# EAGLE board CT_schematic (EAGLE 7.6.0)

Size 100 x 80 mm. Coordinates in mm from the lower left corner, seen from the top.
Outline: 0,0 100,0 100,80 0,80 0,0
Copper layers (1*16): Top 0.035mm / dielectric 1.5mm / Bottom 0.035mm
Design rules "default": minimum track width 10mil, minimum drill 24mil, track to track 8mil, track to pad 8mil, pad to pad 8mil, via to via 8mil, smd to smd 8mil, copper to edge 40mil, drill to drill 8mil, minimum pad ring 10mil, minimum via ring 8mil, stop-mask expansion 4mil, vias tented up to drill 0mil, thermal gap 10mil

## Footprints (pad centres in the part's own frame; a part is rotated, then mirrored left to right if it is on the bottom)
C0603 = smd 0.8 x 0.8: 1 -0.762,0; 2 0.762,0
C0402 = smd 0.5 x 0.5: 1 -0.508,0; 2 0.508,0
EXV-9B = smd 2.718 x 1.778: 1 -2.108,0; 2 2.108,0
EXV-9H = smd 3.505 x 1.676: 1 -2.857,0; 2 2.857,0
L0603 = smd 0.8 x 0.8: 1 -0.762,0; 2 0.762,0
PJ-037B_PACKAGE = drill 3.7 square: 1 12,0 | drill 3.2 square: 2 6,0
R0603 = smd 0.8 x 0.8: 1 -0.762,0; 2 0.762,0
UFQFPN32 = smd 0.6 x 0.3: 1 -2.35,1.75; 2 -2.35,1.25; 3 -2.35,0.75; 4 -2.35,0.25; 5 -2.35,-0.25; 6 -2.35,-0.75; 7 -2.35,-1.25; 8 -2.35,-1.75; 17 2.35,-1.75; 18 2.35,-1.25; 19 2.35,-0.75; 20 2.35,-0.25; 21 2.35,0.25; 22 2.35,0.75; 23 2.35,1.25; 24 2.35,1.75 | smd 0.3 x 0.6: 9 -1.75,-2.35; 10 -1.25,-2.35; 11 -0.75,-2.35; 12 -0.25,-2.35; 13 0.25,-2.35; 14 0.75,-2.35; 15 1.25,-2.35; 16 1.75,-2.35; 25 1.75,2.35; 26 1.25,2.35; 27 0.75,2.35; 28 0.25,2.35; 29 -0.25,2.35; 30 -0.75,2.35; 31 -1.25,2.35; 32 -1.75,2.35 | smd 3.45 x 3.45: EPAD 0,0
TSC2014IYZGT = smd 0.3 x 0.3: A1 0,0; A2 0.5,0; A3 1,0; B1 0,-0.5; B2 0.5,-0.5; B3 1,-0.5; C1 0,-1; C2 0.5,-1; C3 1,-1; D1 0,-1.5; D2 0.5,-1.5; D3 1,-1.5
HTSS-105-01-G-D = drill 1 pad 1.8 square: 1 0,0 | drill 1 pad 1.8: 2 0,2.54; 3 2.54,0; 4 2.54,2.54; 5 5.08,0; 6 5.08,2.54; 7 7.62,0; 8 7.62,2.54; 9 10.16,0; 10 10.16,2.54
ASEK = smd 1.4 x 1: 1 -1.1,-0.8; 2 1.1,-0.8; 3 1.1,0.8; 4 -1.1,0.8
ASFL1 = smd 1.7 x 1.5: 1 -1.27,-1.1; 2 1.27,-1.1; 3 1.27,1.1; 4 -1.27,1.1
LP2954 = smd 1.6 x 0.6: 1 -2.475,1.905 | smd 1.55 x 0.6: 2 -2.475,0.635; 3 -2.475,-0.635; 4 -2.475,-1.905; 5 2.475,-1.905; 6 2.475,-0.635; 7 2.475,0.635; 8 2.475,1.905
SON-6 = smd 0.55 x 0.3: 1 -0.355,0.5 | smd 0.52 x 0.3: 2 -0.37,0; 3 -0.37,-0.5; 4 0.37,-0.5; 5 0.37,0; 6 0.37,0.5
SW_4-1437565-2 = smd 1.4 x 2.1: 1 -2.23,4.55; 2 -2.23,-4.55; 3 2.23,4.55; 4 2.23,-4.55
LGM67K-G1J2-24-Z = smd 0.8 x 1.4: A -2,0; C 0,0
NC7SZ125M5X = smd 1.3 x 0.7: 1 -1.3,0.95; 2 -1.3,0; 3 -1.3,-0.95; 4 1.3,-0.95; 5 1.3,0.95

## Placement (x,y rotation side)
C1  1e-07  [C0603]  -38.1,58.42 0 top  (outside the outline)
C2  1e-07  [C0603]  -41.91,58.42 0 top  (outside the outline)
C3  1e-07  [C0603]  -45.72,58.42 0 top  (outside the outline)
C4  1e-07  [C0603]  -49.53,58.42 0 top  (outside the outline)
C5  4.7e-06  [C0603]  -34.29,58.42 0 top  (outside the outline)
C6  1e-08  [C0603]  -53.34,58.42 0 top  (outside the outline)
C7  1e-06  [C0603]  -57.15,58.42 0 top  (outside the outline)
C8  1e-07  [C0402]  -45.72,63.5 0 top  (outside the outline)
C9  1e-06  [C0603]  -15.24,63.5 0 top  (outside the outline)
C10  1e-08  [C0402]  -49.53,63.5 0 top  (outside the outline)
C11  1e-08  [C0402]  -53.34,63.5 0 top  (outside the outline)
C12  1e-06  [EXV-9B]  -44.45,45.72 0 top  (outside the outline)
C13  2.2e-06  [EXV-9B]  -53.34,45.72 0 top  (outside the outline)
C14  1e-07  [C0402]  -57.15,63.5 0 top  (outside the outline)
C15  0.0001  [EXV-9H]  -38.1,39.37 0 top  (outside the outline)
C16  0.0001  [EXV-9H]  -49.53,39.37 0 top  (outside the outline)
C17  1e-08  [C0402]  -15.24,68.58 0 top  (outside the outline)
F1  240.0  [L0603]  -19.05,63.5 0 top  (outside the outline)
J1  PJ-037B  [PJ-037B_PACKAGE]  -27.94,7.62 0 top  (outside the outline)
R1  10000.0  [R0603]  -53.34,53.34 0 top  (outside the outline)
R2  1000.0  [R0603]  -22.86,63.5 0 top  (outside the outline)
R3  1600.5  [R0603]  -26.67,63.5 0 top  (outside the outline)
R4  4700.0  [R0603]  -30.48,63.5 0 top  (outside the outline)
R5  2200.0  [R0603]  -34.29,63.5 0 top  (outside the outline)
R6  2200.0  [R0603]  -38.1,63.5 0 top  (outside the outline)
R7  10000.0  [R0603]  -58.42,53.34 0 top  (outside the outline)
R8  10000.0  [R0603]  -15.24,58.42 0 top  (outside the outline)
R9  10000.0  [R0603]  -20.32,58.42 0 top  (outside the outline)
R10  100000.0  [R0603]  -27.94,53.34 0 top  (outside the outline)
R11  100000.0  [R0603]  -33.02,53.34 0 top  (outside the outline)
R12  164658.62  [R0603]  -22.86,53.34 0 top  (outside the outline)
R13  100000.0  [R0603]  -38.1,53.34 0 top  (outside the outline)
R14  10000.0  [R0603]  -25.4,58.42 0 top  (outside the outline)
R15  10000.0  [R0603]  -30.48,58.42 0 top  (outside the outline)
R16  9100.0  [R0603]  -41.91,63.5 0 top  (outside the outline)
R17  680000.0  [R0603]  -43.18,53.34 0 top  (outside the outline)
R18  120000.0  [R0603]  -48.26,53.34 0 top  (outside the outline)
U1  STM32L031K6U7  [UFQFPN32]  -24.13,19.05 0 top  (outside the outline)
U2  TSC2014IYZGT  [TSC2014IYZGT]  -38.1,46.99 0 top  (outside the outline)
U3  HTSS-105-01-G-D  [HTSS-105-01-G-D]  -43.18,19.05 0 top  (outside the outline)
U4  ASEK-32.768KHz-ECST  [ASEK]  -29.21,39.37 0 top  (outside the outline)
U5  ASFL1-12MHZ-NCS  [ASFL1]  -43.18,29.21 0 top  (outside the outline)
U6  LP2954AIMX/NOPB  [LP2954]  -25.4,30.48 0 top  (outside the outline)
U7  TPS3895ADRYR  [SON-6]  -17.78,67.31 0 top  (outside the outline)
U8  4-1437565-2  [SW_4-1437565-2]  -44.45,6.35 0 top  (outside the outline)
U9  Q65110A2395  [LGM67K-G1J2-24-Z]  -17.78,46.99 0 top  (outside the outline)
U10  nc7sz125m5x  [NC7SZ125M5X]  -15.24,52.07 0 top  (outside the outline)

## Library data of the parts
C1-C17 F1 J1 R1-R18 U1-U10 = circuit_tree

## Nets
CLK_U1_2: U1.2 U4.3
CLK_U1_6: U1.6 U5.3
GND: C1.2 C2.2 C3.2 C4.2 C5.2 C6.2 C7.2 C8.2 C9.2 C10.2 C11.2 C12.2 C13.2 C14.2 C15.2 C16.2 C17.2 J1.2 R2.2 R7.2 R13.2 R16.2 R18.2 U1.EPAD U2.D2 U3.9 U4.2 U5.2 U6.4 U7.2 U9.C U10.1 U10.3
NET_U1_4: R4.1 U1.4 U10.4
NET_U1_5: C6.1 C7.1 F1.1 U1.5
NET_U1_19: R5.1 U1.19 U2.D1
NET_U1_20: R6.1 U1.20 U2.C1
NET_U1_30: R3.1 U1.30 U9.A
NET_U1_31: R7.1 U1.31
NET_U1_32: R1.1 U1.32 U8.3 U8.4
NET_U2_B1: R9.1 U2.B1
NET_U2_C2: R8.1 U2.C2
NET_U3_3: U2.B3 U3.3
NET_U3_4: U2.D3 U3.4
NET_U3_5: U2.A3 U3.5
NET_U3_6: U2.C3 U3.6
NET_U6_3: R11.1 U6.3
NET_U6_5: R10.1 U6.5
NET_U6_7: R12.2 R13.1 U6.7
NET_U7_1: R15.1 R16.1 U7.1
NET_U7_3: R17.2 R18.1 U7.3
NET_U7_4: R14.1 U7.4 U10.2
NET_U8_1: R2.1 U8.1 U8.2
VCC_S1_16V3: C12.1 C15.1 C16.1 J1.1 R11.2 U6.8
VCC_TIER1_3V3: C1.1 C2.1 C3.1 C4.1 C5.1 C8.1 C9.1 C10.1 C11.1 C13.1 C14.1 C17.1 F1.2 R1.2 R3.2 R4.2 R5.2 R6.2 R8.2 R9.2 R10.2 R12.1 R14.2 R15.2 R17.1 U1.1 U1.17 U2.A2 U2.B2 U4.4 U5.4 U6.1 U7.6 U10.5

## Tracks (layer width: path | path; a pad name or v marks a point on that pad's centre or on a via)
CLK_U1_2  (1 unrouted)
CLK_U1_6  (1 unrouted)
GND  (32 unrouted)
NET_U1_4  (2 unrouted)
NET_U1_5  (3 unrouted)
NET_U1_19  (2 unrouted)
NET_U1_20  (2 unrouted)
NET_U1_30  (2 unrouted)
NET_U1_31  (1 unrouted)
NET_U1_32  (3 unrouted)
NET_U2_B1  (1 unrouted)
NET_U2_C2  (1 unrouted)
NET_U3_3  (1 unrouted)
NET_U3_4  (1 unrouted)
NET_U3_5  (1 unrouted)
NET_U3_6  (1 unrouted)
NET_U6_3  (1 unrouted)
NET_U6_5  (1 unrouted)
NET_U6_7  (2 unrouted)
NET_U7_1  (2 unrouted)
NET_U7_3  (2 unrouted)
NET_U7_4  (2 unrouted)
NET_U8_1  (2 unrouted)
VCC_S1_16V3  (5 unrouted)
VCC_TIER1_3V3  (33 unrouted)